# Altium PCB PCB1.PcbDoc
Units mil, origin at the board's own origin, x right, y up, seen from the top; angles counter-clockwise.
Board outline 5196.85 x 2716.54 mil, 2 copper layers (Top Layer, Bottom Layer); 32 components, 25 nets, 90 pads, 0 vias.
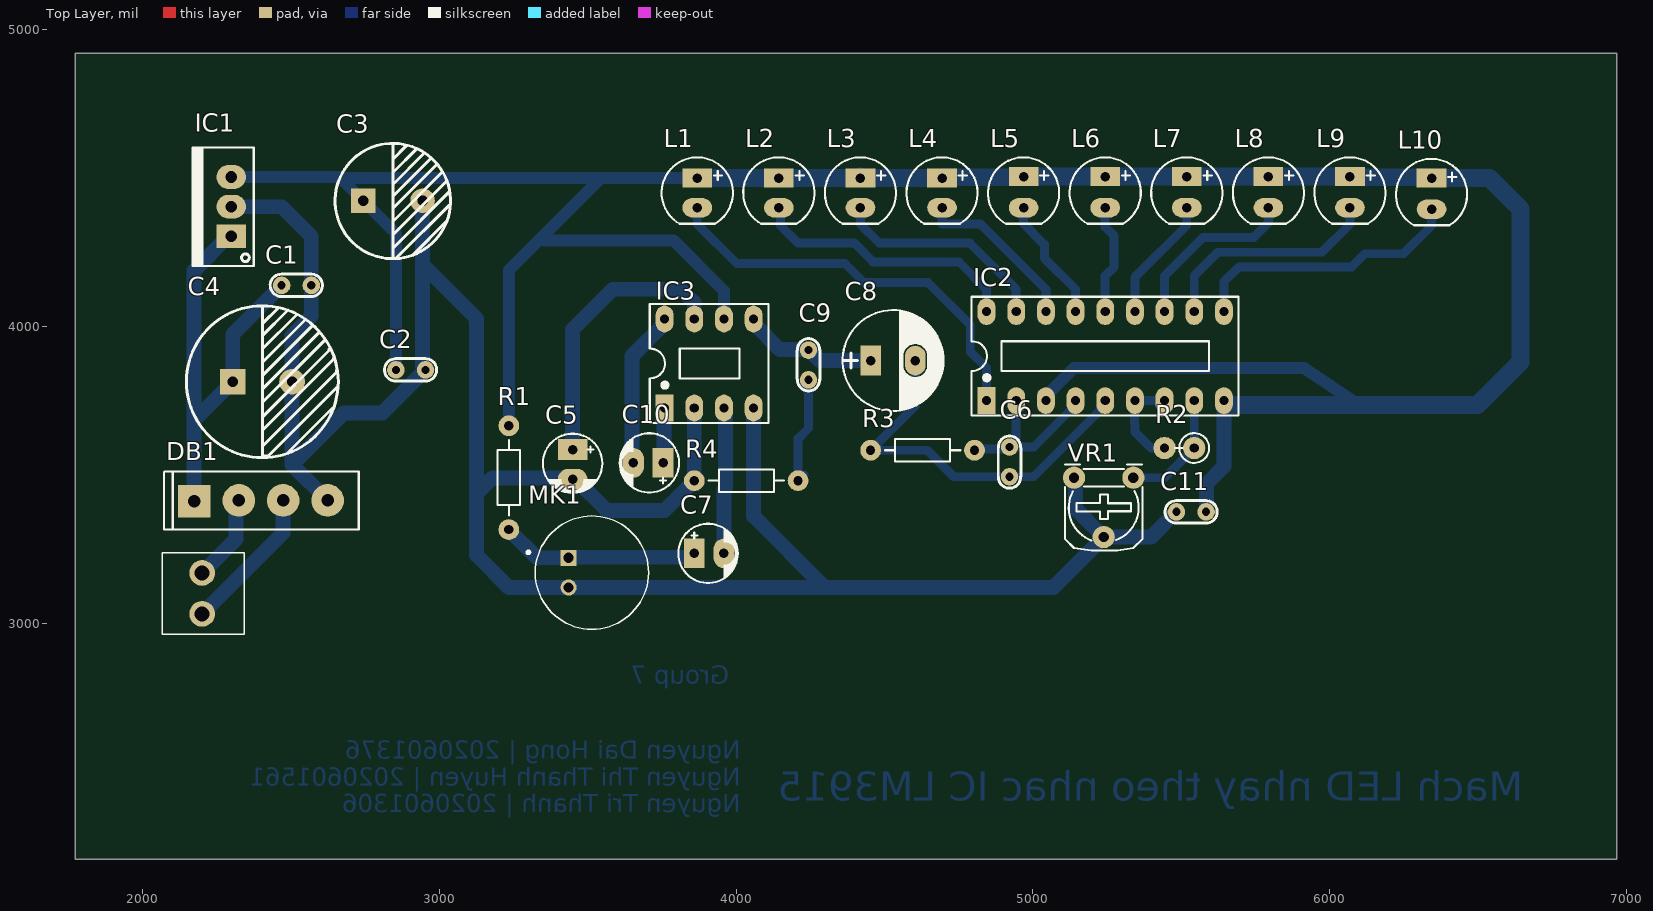
[diagram p0: Top Layer view]
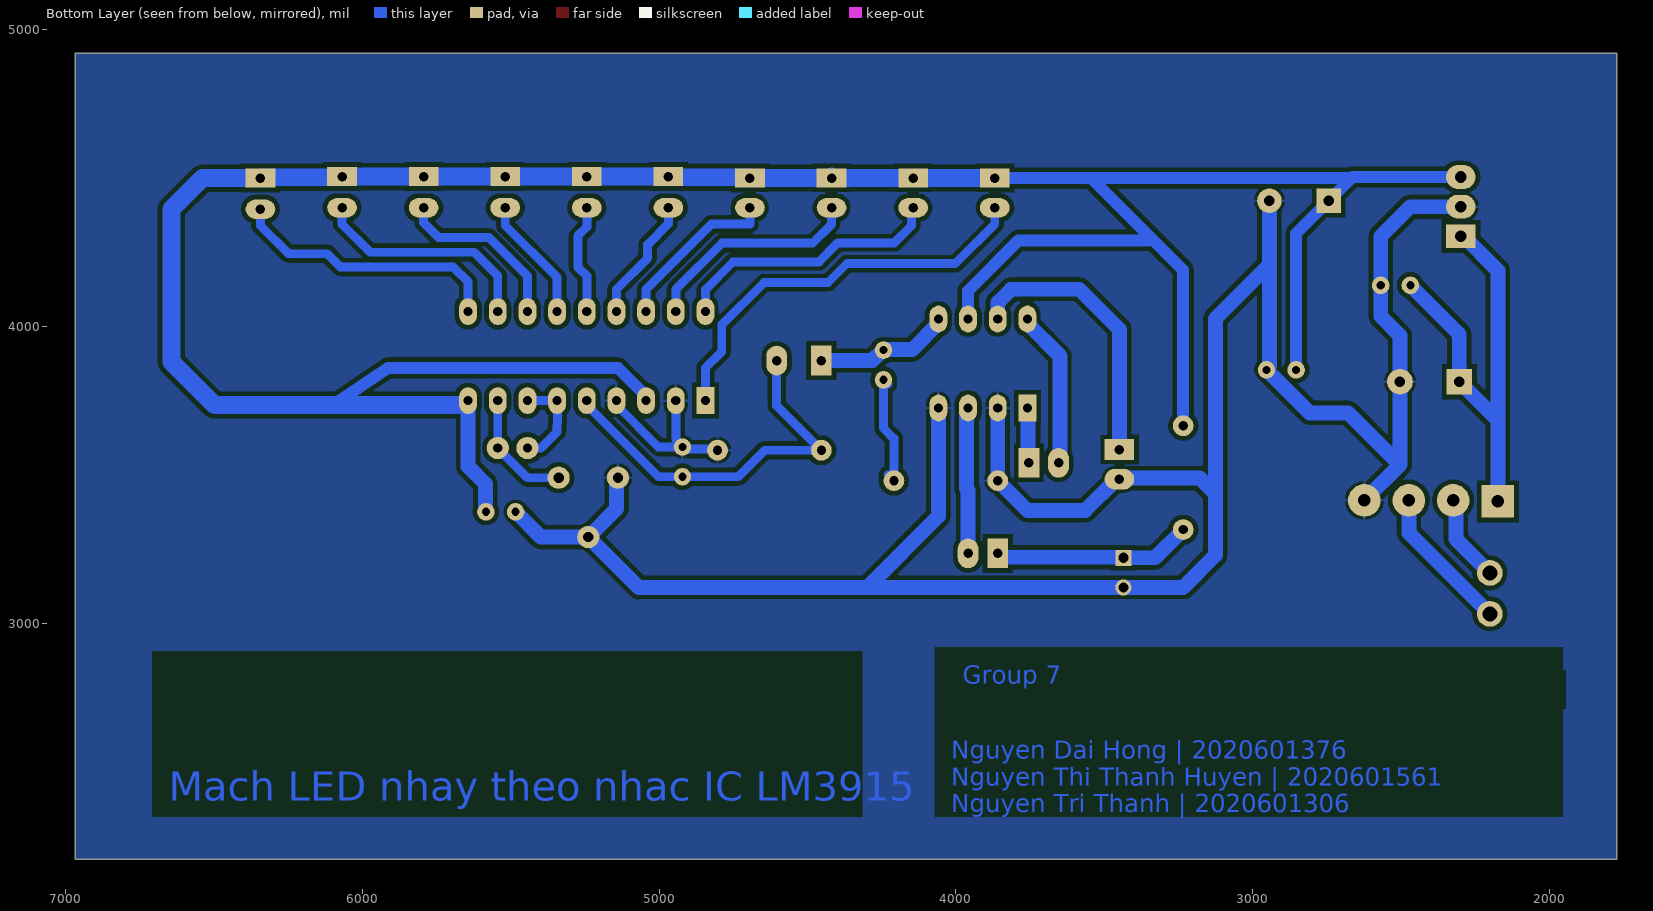
[diagram p1: Bottom Layer view, seen from below]
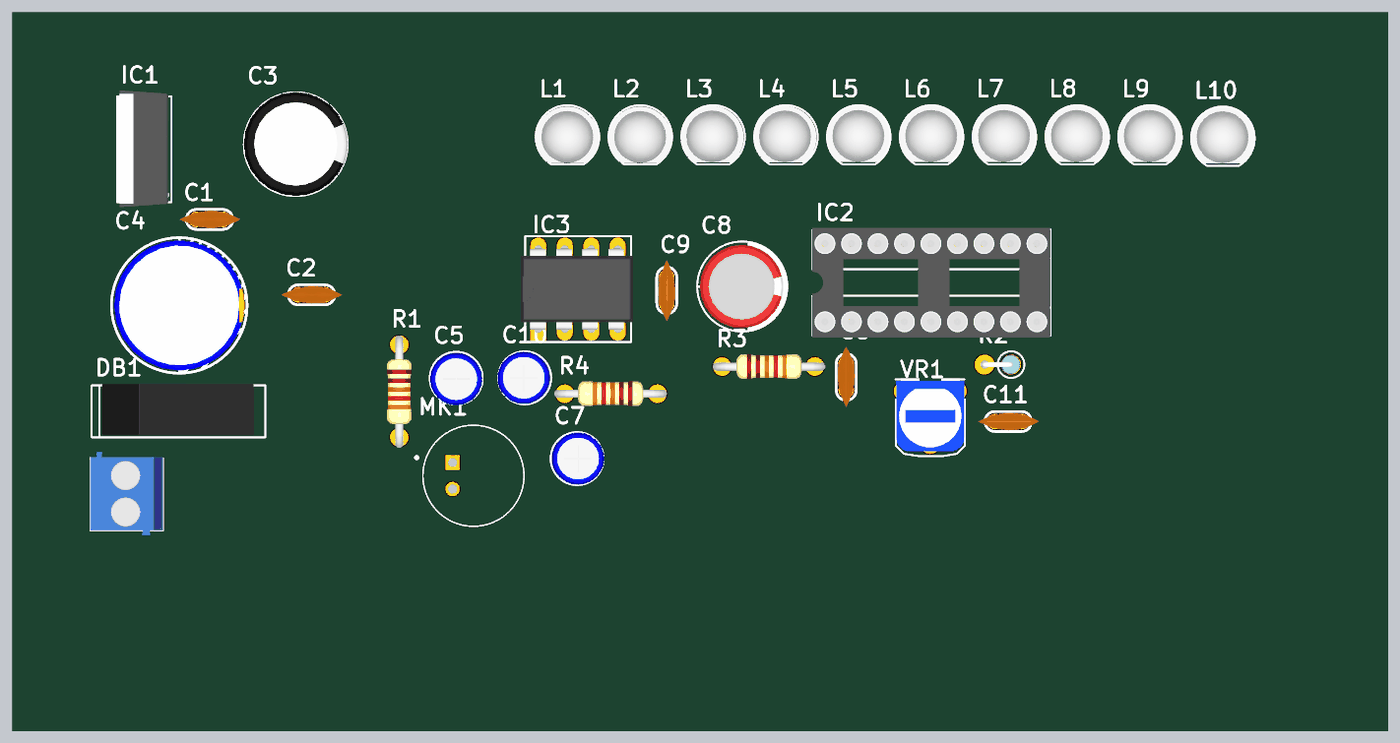
[diagram p2: 3D render of the assembled board from above, using the file's embedded part models]

## Layer stack, top to bottom
Top Solder: solder mask 0.4, Solder Resist, Dk 3.5
Top Layer: signal copper 1.4
Dielectric 1: dielectric 12.6, FR-4, Dk 4.8
Bottom Layer: signal copper 1.4
Bottom Solder: solder mask 0.4, Solder Resist, Dk 3.5

## Board outline
1771.65,4921.26 6968.5,4921.26 6968.5,2204.72 1771.65,2204.72

## Design rules (kind name [scope] priority, off if disabled: settings)
Clearance [All] p1: gap=15 ignorepadtopadclearanceinfootprint=FALSE
PolygonConnect [All] p1: connectstyle=Relief reliefconductorwidth=10 reliefentries=4 polygonreliefangle="90 Angle" airgapwidth=10
RoutingLayers [All] p1: top layer_v5=FALSE bottom layer_v5=TRUE
RoutingVias [All] p1: holewidth=28 width=50 viastyle="Through Hole" minholewidth=28 minwidth=50 maxholewidth=28 maxwidth=50
SolderMaskExpansion [All] p1: expansion=4
Width net [InNet('No Net')] p1: maxlimit=50 minlimit=25 preferedwidth=35
Width Vcc [InNet('VCC')] p2: maxlimit=80 minlimit=40 preferedwidth=50
Width Gnd [InNet('GND')] p3: maxlimit=80 minlimit=40 preferedwidth=50
29 further rules are at their usual default settings.

## Components (designator, comment, footprint, x,y, rotation, side; value= is the part's Value field where it differs from the comment)
C1 "104" "tu gom" 2517.91,4138.5 r0 top
C2 "104" "tu gom" 2902.91,3853.5 r0 top
C3 "100uF" "Tu hoa 10mm" 2842.91,4423.5 r0 top
C4 "1000uF" "tu hoa 13mm" 2402.91,3813.5 r0 top
C5 "10uF" CP1/2 3448.7,3585 r270 top value=10uF/50V
C6 "103" "tu gom" 4921.26,3543.31 r90 top
C7 "10uF" CP1/2 3858.7,3235 r0 top value=10uF/50V
C8 "100uF/35V" CP1.5/3.4 4453.7,3885 r0 top value=100uF/35V/50V
C9 "103" "tu gom" 4243.7,3870 r270 top
C10 "10uF" CP1/2 3753.7,3540 r180 top value=10uF/50V
C11 "103" "tu gom" 5533.7,3375 r0 top
DB1 "Diode Brideg" "CAU 1A" 2172.91,3412.5 r0 top value="Cau 1A"
IC1 "LM7805" QTO-220 2297.91,4303.5 r90 top
IC2 "LM3915 DIP" DIP18 4843.7,3750 r0 top
IC3 "LM386" DIP8 3903.7,3875 r0 top value=LM358
L1 "LED 5mm" LED-5MM-RED 3868.7,4500 r270 top
L2 "LED 5mm" LED-5MM-RED 4143.7,4500 r270 top
L3 "LED 5mm" LED-5MM-Yellow 4418.7,4500 r270 top
L4 "LED 5mm" LED-5MM-Yellow 4693.7,4500 r270 top
L5 "LED 5mm" LED-5MM-Green 4968.7,4500 r270 top
L6 "LED 5mm" LED-5MM-Green 5243.7,4500 r270 top
L7 "LED 5mm" LED-5MM-Green 5518.7,4500 r270 top
L8 "LED 5mm" LED-5MM-Green 5793.7,4500 r270 top
L9 "LED 5mm" LED-5MM-Green 6068.7,4500 r270 top
L10 "LED 5mm" LED-5MM-Green 6343.7,4495 r270 top
MK1 "CMA-4544PF-W" MIC_CMA-4544PF-W 3513.7,3170 r180 top
R1 "Res1" R1/4W 3233.7,3315 r90 top value=1K
R2 "Res1" R1/4W1 5543.7,3590 r180 top value=1k
R3 "Res1" R1/4W 4803.15,3582.68 r180 top value=1K
R4 "Res1" R1/4W 3858.7,3480 r0 top value=1K
VR1 "10K" "Bien Tro Tam Giac Dung" 5338.7,3490 r180 top
? "KF2" KF2-3.5 2200,3100 r90 top

## Footprints (in the part's own frame and the unit in brackets; to place one, negate y for a bottom-side part, rotate by r counter-clockwise, add the part's x,y. Pads: shape width x height; smd on the part's side, far side on the other; paste and mask are expansions set on the pad)
"Bien Tro Tam Giac Dung" [mil] "RM065"
  round 75 hole 35: 1(0,0) 2(100,200) 3(200,0)
  silkscreen extent -31,-44 231,246, body extent -28,-50 228,228, height 279
"CAU 1A" [mil] "CAU 1A DET"
  rect 110x110 hole 42: 1(0,-2)
  round 110 hole 42: 2(151,1) 3(300,1) 4(450,1)
  silkscreen extent -101,-97 555,99, body extent -62,-90 512,107, height 453
CP1.5/3.4 [mil] "Tu hoa 220->470uF,16V, 470uF/16V,25V"
  rect 70x100 hole 32: 1(0,0)
  oval 70x100 hole 32: 2(150,0)
  silkscreen extent -95,-170 245,170, body extent -85,-157 230,157, height 446
CP1/2 [mil] "Tu hoa < 22uF/16>50V"
  rect 70x100 hole 32: 1(0,0)
  oval 70x100 hole 32: 2(100,0)
  silkscreen extent -53,-100 146,100, body extent -49,-99 149,99, height 287
DIP8 [mil] "DIP, 8-Leads, Row Spacing 7.62mm, Pitch 2.54mm, Body 9.91x6.73mm"
  rect 60x90 hole 31: 1(-145,-150)
  oval 60x90 hole 31: 2(-45,-150) 3(55,-150) 4(155,-150) 5(155,150) 6(55,150) 7(-45,150) 8(-145,150)
  silkscreen extent -195,-200 205,200, body extent -213,-153 213,153, height 177
DIP18 [mil] "18 PIN, W 300mil, Pin to pin 100mil"
  rect 60x90 hole 31: 1(0,0)
  oval 60x90 hole 31: 2(100,0) 3(200,0) 4(300,0) 5(400,0) 6(500,0) 7(600,0) 8(700,0) 9(800,0) 10(800,300) 11(700,300) 12(600,300) 13(500,300) 14(400,300) 15(300,300) 16(200,300) 17(100,300) 18(0,300)
  silkscreen extent -50,-50 850,350, body extent -51,-57 849,356, height 119
KF2-3.5 [mm] "3,50mm - modular - blue - Horizontal wire entry - Pressure clamp - 8,4mm height - 02p"
  round 2.2 hole 1.3: 1(-1.75,0) 2(1.75,0)
  silkscreen extent -3.5,-3.6 3.5,3.4, body extent -3.95,-3.6 4.05,3.4, height 8.41
LED-5MM-Green [mil] "LED 2 PIN, 5 ly , Only colour,pin to pin 100mil"
  rect 65x100 hole 32: 1(-5,0)
  oval 65x100 hole 32: 2(100,0)
  silkscreen extent -70,-120 154,120, body extent -69,-120 145,117, height 339
LED-5MM-RED [mil] "LED 2 PIN, 5 ly , Only colour,pin to pin 100mil"
  rect 65x100 hole 32: 1(0,0)
  oval 65x100 hole 32: 2(100,0)
  silkscreen extent -70,-120 154,120, body extent -65,-119 149,118, height 339
LED-5MM-Yellow [mil] "LED 2 PIN, 5 ly , Only colour,pin to pin 100mil"
  rect 65x100 hole 32: 1(0,0)
  oval 65x100 hole 32: 2(100,0)
  silkscreen extent -70,-120 154,120, body extent -67,-122 147,115, height 339
MIC_CMA-4544PF-W [mm]
  rect 1.378x1.378 hole 0.87: 1(2,-1.27)
  round 1.378 hole 0.87: 2(2,1.27)
  silkscreen extent -4.85,-4.85 5.54,4.85
QTO-220 [mil] "TO-220 - 1-2-3"
  rect 80x100 hole 39: 1(0,0)
  oval 80x100 hole 39: 2(100,0) 3(200,0)
  silkscreen extent -100,-76 300,130, body extent -119,-64 322,121, height 755
R1/4W [mil] "R 1/4W, 2 Pin, 350mil"
  round 70 hole 31: 1(0,0) 2(350,0)
  silkscreen extent 48,-38 302,38, body extent -40,-47 386,47, height 111
R1/4W1 [mm] "R 1/4W, 2 Pin, 150mil"
  round 1.905 hole 0.8: 1(0,0) 2(2.54,0)
  silkscreen extent -1.28,-1.28 1.65,1.28, body extent -0.89,-0.92 2.82,0.92, height 7.3
"tu gom" [mm] "Tu gom mini"
  round 1.5 hole 0.7: 1(-1.27,0) 2(1.27,0)
  silkscreen extent -2.25,-0.97 2.22,0.97, body extent -2.92,-0.85 2.92,0.85, height 6.12
"Tu hoa 10mm" [mm]
  rect 2.1x2.1 hole 0.9: 1(-2.54,0)
  round 2.1 hole 0.9: 2(2.54,0)
  silkscreen extent -4.95,-4.96 4.93,4.92, body extent -5,-5 4.97,5, height 20.01
"tu hoa 13mm" [mm]
  rect 2.2x2.2 hole 0.9: 1(-2.54,0)
  round 2.2 hole 0.9: 2(2.54,0)
  silkscreen extent -6.5,-6.5 6.5,6.5, body extent -6.25,-6.25 6.26,6.25, height 23.02

## Part data
C1 C2: library part "Tu gom 104 50V", "C?m", Chung_Loai=C?m, Don_Vi=Con, Ma_Hang=MH004761, So_Chan=2, Ten_Linh_Kien="T? g?m 104 100nF 50V"
C3: library part "Tu Hoa 100uF 100V 10x20", "C?m", Chung_Loai=C?m, Don_Vi=Con, Ma_Hang=MH003150, So_Chan=2, Ten_Linh_Kien="T? Hóa 100uF 100V 10x20MM"
C4: library part "Tu Hoa 1000uF 25V 13x21", "C?m", Chung_Loai=C?m, Don_Vi=Con, Ma_Hang=MH002315, So_Chan=2, Ten_Linh_Kien="T? Hóa 1000uF 25V 13x21MM"
C5 C7 C10: library part CP1, "Cap P  0,1uF < 22uF , 16 - 50V", Description 1="10 => 220uF/6,3V/10V - 10uF => 100uF/16V", Description 2="0,1uF => 33uF/50V - 10uF => 22uF/63V", Description 3="0,47uF => 10uF/100V"
C6 C9 C11: library part "Tu gom 103 50V", "C?m", Chung_Loai=C?m, Don_Vi=Con, Ma_Hang=MH000936, So_Chan=2, Ten_Linh_Kien="T? g?m 103 10nF 50V"
C8: library part CP3, "Cap 100uF/35V - 470uF/16V", Description 1="1000uF/6,3V - 470uF/16V - 330uF - 25V", Description 2="220uF/35V - 100uF/50V - 63V - 4,7uF/200V", Description 3="22uF => 33uF100V - 3,3uF => 4,7uF/250V", Description 4="2,2uF =>3,3uF/350 - 2,2uF/400V - 1uF/450V"
DB1: library part DB, "Convert AC to DC voltage, 4 pin", ="Cau 5A"
IC1: library part LM78xx, "On ap +, from + 5 to + 24VDC", =LM7808
IC2: library part "LM3914 DIP", "C?m", Chung_Loai=C?m, Don_Vi=Con, Ma_Hang=MH002419, Ten_Linh_Kien="LM3914 DIP18"
IC3: "Low-Power Dual Operational Amplifier"
L1 L2: library part "LED 5mm Do", "C?m", Chung_Loai=C?m, Don_Vi=Con, Ma_Hang=MH008967, Ten_Linh_Kien="Led 5MM Ph? Ð? (1000c)"
L3 L4: library part "LED 5mm Vang", "C?m", Chung_Loai=C?m, Don_Vi=Con, Ma_Hang=MH008968, Ten_Linh_Kien="Led 5MM Ph? Vàng (1000c)"
L5 L6 L7 L8 L9 L10: library part "LED 5mm Xanh La", "C?m", Chung_Loai=C?m, Don_Vi=Con, Ma_Hang=MH008969, Ten_Linh_Kien="LED 5MM Ph? Xanh (1000c)"
MK1: "CMA Series 9.7 mm Electret Condenser Omni-Directional Pin Mount 3 V Microphone", Package=None, Availability=Unavailable, MP=CMA-4544PF-W, Price=None
R1 R3 R4: library part Res1_4, "Resistor", Manufacturer="Generic Components", Class=Passive, Published=08/06/2000, Publisher="Altium Hobart Technology Centre", SubClass=Resistor
R2: library part Res1_2, "Resistor", Manufacturer="Generic Components", Class=Passive, Published=08/06/2000, Publisher="Altium Hobart Technology Centre", SubClass=Resistor
VR1: library part "Bien tro tam giac 10K Dung", "C?m", Chung_Loai=C?m, Don_Vi=Con, Ma_Hang=MH000919, Ten_Linh_Kien="Bi?n Tr? Tam Giác 103-10K RM065 (Chân Ð?ng)"
?: Manufacturer="Würth Elektronik eiSos GmbH", partNo=691103110002, ComponentLink1 Description=Manufacturer, ComponentLink1URL=http://www.we-online.com, ComponentLink2 Description=Datasheet, ComponentLink2URL=http://katalog.we-online.de/em/datasheet/6911031100xx.pdf, Created by="Karrer Zheng", Created Date="29 October 2013", NoPins=2

## Nets (pads, with @x,y where several pads share a name; then routed paths per layer and width w, separated by ;. In a path a pad name is that pad's centre, name@x,y a point inside that pad or via, vN(x,y) a via of type N, cw(c..) or ccw(c..) an arc to the next point about the centre after c; other vN are vias at no path point)
2: C1.2 C2.2 C3.2 C4.2 C5.2 C6.2 C11.1 DB1.4 IC1.2 IC2.2 IC2.4 IC3.2 IC3.4 MK1.2 R3.1 R4.1 VR1.2 VR1.3 | length 8616.3
  Bottom Layer w30: R3.1 4806.98,3586.5 4912.01,3586.5 4918.81,3593.31 C6.2 ; IC2.2 4943.7,3618.2 4921.26,3595.76 C6.2 ; IC2.4 5143.7,3735 5002.01,3593.31 C6.2 ; VR1.2@5230.96,3297.74 VR1.2
  Bottom Layer w50: IC1.2 2467.91,4403.5 2567.91,4303.5 C1.2 2567.91,4033.98 2502.91,3968.98 C4.2 2502.91,3533.5 ; DB1.4 2502.91,3533.5 ; C3.2 2942.91,4208.09 ; IC3.2 R4.1 3758.7,3380 3563.29,3380 3458.29,3485 C5.2 3444.87,3488.83 3177.53,3488.83 3125,3436.3 ; IC3.4 4058.7,3360 4298.7,3120 ; VR1.3 5143.48,3485.22 5143.48,3385.22 VR1.2@5230.96,3297.74 ; C11.1 5398.7,3290 VR1.2 5068.7,3120 4298.7,3120 ; 2502.91,3533.5 2677.91,3708.5 2807.91,3708.5 C2.2 2952.91,3855.95 2942.91,3865.95 2942.91,4208.09 ; 2942.91,4208.09 3125,4026 3125,3436.3 ; 3125,3436.3 3125,3228.7 3233.7,3120 MK1.2 4298.7,3120
5v: C2.1 C3.1 C11.2 IC1.3 IC2.3 IC2.9 IC3.6 L1.1 L2.1 L3.1 L4.1 L5.1 L6.1 L7.1 L8.1 L9.1 L10.1 R1.2 | length 9986
  Bottom Layer w40: IC1.3 2662.91,4503.5 2666.42,4500 ; C2.1 2852.91,4313.5 C3.1 2666.42,4500 ; R1.2 3233.7,4190 3543.7,4500 ; 3353.7,4290 3788.7,4290 3958.7,4120 IC3.6 ; L1.1 3543.7,4500 ; IC2.3 5043.7,3765 5138.7,3860 5913.7,3860 6098.7,3735 ; 2666.42,4500 3543.7,4500
  Bottom Layer w50: C11.2 5585.43,3376.73 5585.43,3469.43 5643.7,3527.7 5643.7,3744.24 IC2.9
  Bottom Layer w60: L1.1 L2.1 L3.1 4418.7,4505 4423.7,4500 L4.1 4696.2,4502.5 4966.2,4502.5 L5.1 L6.1 L7.1 L8.1 L9.1 6071.2,4502.5 6341.2,4502.5 L10.1 6539,4500 6643.7,4395.3 6643.7,3880 6498.7,3735 6098.7,3735 5652.94,3735 IC2.9@5643.7,3744.24
audio: C6.1 C8.2 IC2.5 R3.2 | length 1307.4
  Bottom Layer w30: C8.2 4603.7,3733.23 R3.2 4644,3582.68 4733.37,3493.31 C6.1 5002.01,3493.31 5243.7,3735 IC2.5
"Net _1": ?.1 DB1.3 | length 495.4
  Bottom Layer w50: ?.1 2472.91,3304.02 DB1.3
"Net _2": ?.2 DB1.2 | length 295.9
  Bottom Layer w50: ?.2 2314.61,3283.5 2314.61,3404.2 DB1.2
NetC1_1: C1.1 C4.1 DB1.1 IC1.1 | length 1559
  Bottom Layer w50: DB1.1 2172.91,3683.5 ; IC1.1@2322.91,4288.5 2307.91,4303.5 IC1.1 2287.91,4303.5 2172.91,4188.5 2172.91,3683.5 ; C1.1 2302.91,3973.5 C4.1 2172.91,3683.5
NetC5_1: C5.1 IC3.7 | length 944.6
  Bottom Layer w50: C5.1 3448.7,3990 3583.7,4125 3813.7,4125 3858.7,4080 IC3.7
NetC7_1: C7.1 MK1.1 R1.1 | length 672.2
  Bottom Layer w50: R1.1 3328.7,3220 MK1.1 3437.09,3222.13 3848.7,3222.13 3858.7,3232.13 C7.1
NetC7_2: C7.2 IC3.3 | length 494.1
  Bottom Layer w50: C7.2 3958.7,3448.93 3963.7,3453.93 3963.7,3702.29 3958.7,3707.29 IC3.3
NetC8_1: C8.1 C9.1 IC3.5 | length 476.8
  Bottom Layer w50: IC3.5 4058.7,4010 4146.97,3921.73 4241.97,3921.73 C9.1 4246.15,3920 4281.15,3885 C8.1 C8.1@4453.7,3900
NetC9_2: C9.2 R4.2 | length 404
  Bottom Layer w30: R4.2@4228.7,3500 R4.2 4208.7,3621.7 4243.7,3656.7 C9.2 C9.2@4228.7,3805
NetC10_1: C10.1 IC3.1 | length 194.1
  Bottom Layer w50: C10.1@3748.7,3535 C10.1 3756.2,3542.5 3756.2,3722.5 IC3.1
NetC10_2: C10.2 IC3.8 | length 535.6
  Bottom Layer w50: C10.2@3648.7,3535 3648.7,3900 3758.7,4010 IC3.8
NetIC2_1: IC2.1 L1.2 | length 1393.7
  Bottom Layer w30: L1.2 3868.7,4345 4001.7,4212 4366.7,4212 4430.7,4148 4645.85,4148 4788.7,4005.15 4788.7,3915 4843.7,3860 IC2.1
NetIC2_6: IC2.6 IC2.7 R2.2 | length 327.6
  Bottom Layer w30: IC2.7@5440.7,3750 5340.7,3750 5343.7,3645.3 5399,3590 R2.2
NetIC2_8: IC2.8 R2.1 VR1.1 | length 391.4
  Bottom Layer w30: VR1.1@5353.7,3490 5443.7,3490 R2.1 IC2.8
NetIC2_10: IC2.10 L10.2 | length 933.7
  Bottom Layer w30: IC2.10 5643.7,4150 5693.7,4200 6073.7,4200 6118.7,4245 6248.7,4245 6343.7,4340 L10.2
NetIC2_11: IC2.11 L9.2 | length 772.5
  Bottom Layer w30: IC2.11 5543.7,4170 5623.7,4250 5973.7,4250 6068.7,4345 L9.2
NetIC2_12: IC2.12 L8.2 | length 612.2
  Bottom Layer w30: IC2.12 5443.7,4170 5573.7,4300 5743.7,4300 5793.7,4350 L8.2 L8.2@5781.2,4387.5
NetIC2_13: IC2.13 L7.2 | length 422.5
  Bottom Layer w30: IC2.13 5343.7,4165 5518.7,4340 L7.2
NetIC2_14: IC2.14 L6.2 | length 381.9
  Bottom Layer w30: IC2.14 5238.7,4050 5243.7,4055 5243.7,4170 5273.7,4200 5273.7,4305 5243.7,4335 L6.2
NetIC2_15: IC2.15 L5.2 | length 427.5
  Bottom Layer w30: L5.2@4973.7,4400 L5.2 4968.7,4345.86 5038.7,4275.86 5038.7,4230 5143.7,4125 IC2.15
NetIC2_16: IC2.16 L4.2 | length 571.1
  Bottom Layer w30: L4.2 4693.7,4345 4823.7,4345 5043.7,4125 IC2.16
NetIC2_17: IC2.17 L3.2 | length 746.1
  Bottom Layer w30: L3.2 4418.7,4345 4482.7,4281 4787.7,4281 4943.7,4125 IC2.17
NetIC2_18: IC2.18 L2.2 | length 941.2
  Bottom Layer w30: L2.2 4161.2,4400 4148.7,4387.5 4148.7,4340 4207.34,4281.36 4397.34,4281.36 4461.7,4217 4750.84,4217 4843.7,4124.14 IC2.18

## Polygon pours and split planes (outlines as drawn)
2 on Bottom Layer "Bottom Layer-2" (solid, pour order 52): 6968.5,4921.26 6968.5,2204.72 1771.65,2204.72 1771.65,4921.26
2 on Bottom Layer "Bottom Layer-GND" (solid, pour order 50): 4180,3400
2 on Bottom Layer "Bottom Layer-GND 2" (solid, pour order 32): 3937.01,5118.11
2 on Bottom Layer "Bottom Layer-GND 3" (solid, pour order 30): 32677.17,6692.91
2 on Bottom Layer "Bottom Layer-GND 1" (none, pour order 20): 1771.65,4921.26
no net on Bottom Layer "Bottom Layer-No Net" (solid, pour order 0): 1850,4975

## Other copper
Bottom Layer:
  text "Group 7" at 3976.38,2795.28 h60
  text "Mach LED nhay theo nhac IC LM3915" at 6653.54,2401.57 h98.43
  text "Nguyen Dai Hong | 2020601376 / Nguyen Thi Thanh Huyen | 2020601561 / Nguyen Tri Thanh | 2020601306" at 4015.75,2362.2 h60

## Silkscreen, mask and mechanical layers (free items; w line width, h text height)
Mechanical 1:
  the board outline again, w39.37